# EAGLE board untitled (EAGLE 6.4)
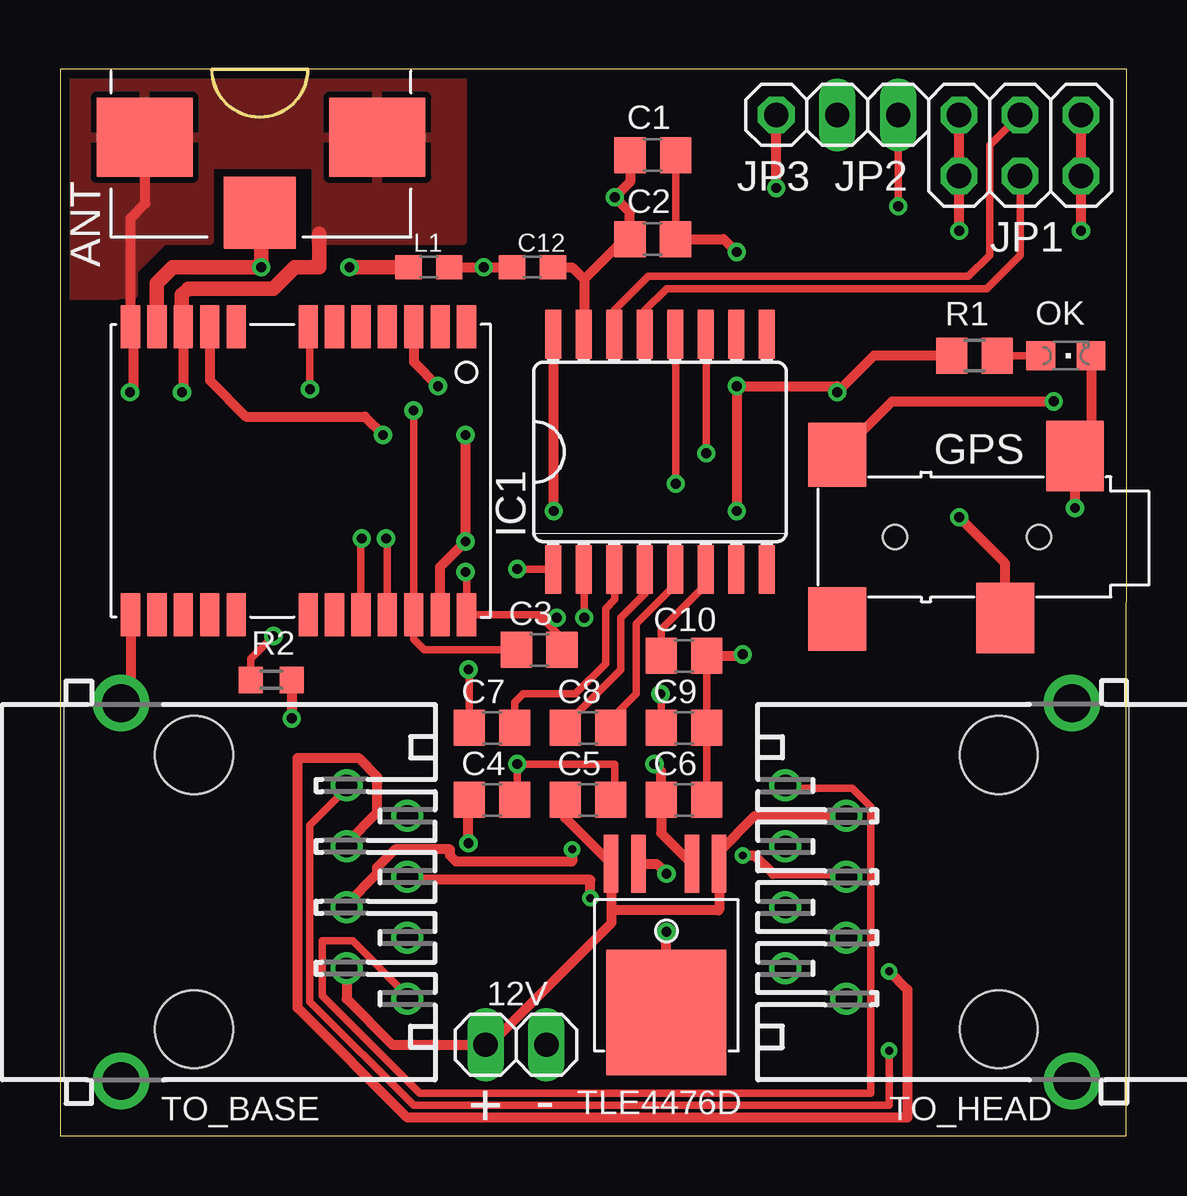
[diagram p0: board, top side]
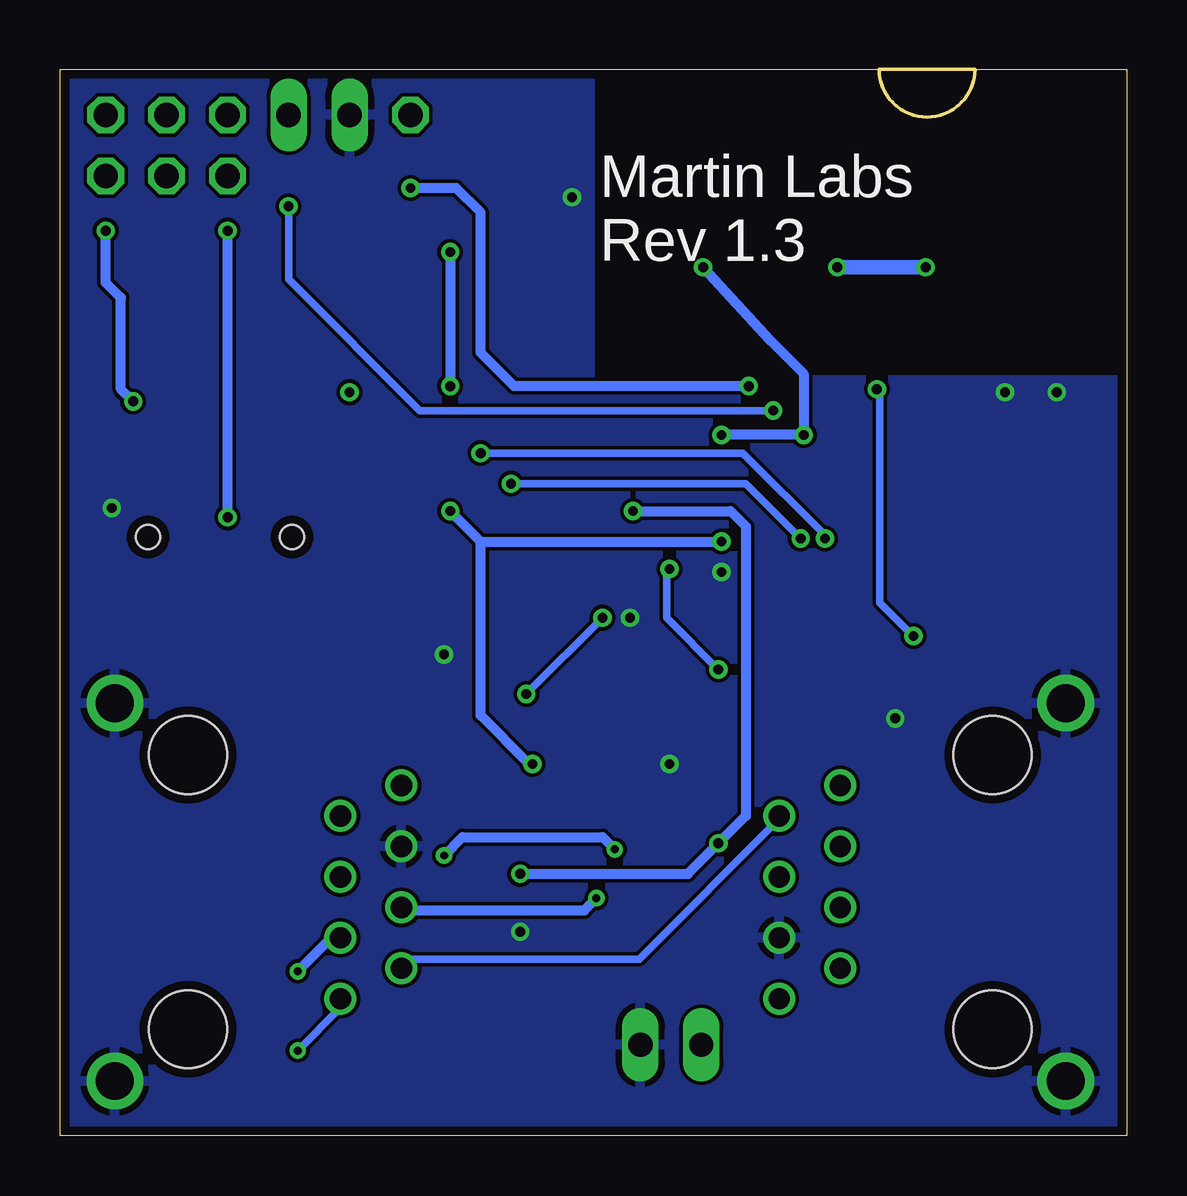
[diagram p1: board, bottom side, seen from below]

Size 44.45 x 44.45 mm. Coordinates in mm from the lower left corner, seen from the top.
Outline: 0,0 44.43,0 44.45,44.45 0,44.45 0,0
Copper layers (1*16): Top 0.0356mm / dielectric 1.5011mm / Bottom 0.0356mm
Design rules "LaenPCBOrder2": minimum track width 6mil, minimum drill 13mil, track to track 6mil, track to pad 6mil, pad to pad 6mil, via to via 6mil, smd to smd 6mil, copper to edge 15mil, drill to drill 6mil, minimum pad ring 7mil, minimum via ring 7mil, stop-mask expansion 4mil, vias tented up to drill 0mil, thermal gap 10mil

## Footprints (pad centres in the part's own frame; a part is rotated, then mirrored left to right if it is on the bottom)
1X02 = drill 1.016 long: 1 -1.27,0; 2 1.27,0
GEO_HELIX_GPSANT = smd 4 x 3.3: GND1 2,-2.84; GND2 11.7,-2.84 | smd 3 x 3: RF_IN 6.8,-5.99
C0805 = smd 1.3 x 1.5: 1 -0.95,0; 2 0.95,0
C0603 = smd 1.1 x 1: 1 -0.85,0; 2 0.85,0
2.5MM_AUDIO = smd 2.4 x 2.95: 1 -9.9,-5.475; 3 -7,1.275 | smd 2.4 x 2.65: 2 0,-5.525; 4 0,1.325 | hole 1: -2.4,-2.1; -8.4,-2.1
SO16L = smd 0.66 x 2.032: 1 -4.445,-4.902; 2 -3.175,-4.902; 3 -1.905,-4.902; 4 -0.635,-4.902; 5 0.635,-4.902; 6 1.905,-4.902; 7 3.175,-4.902; 8 4.445,-4.902; 9 4.445,4.902; 10 3.175,4.902; 11 1.905,4.902; 12 0.635,4.902; 13 -0.635,4.902; 14 -1.905,4.902; 15 -3.175,4.902; 16 -4.445,4.902
2X03 = drill 1.016 octagon: 1 -2.54,-1.27; 2 -2.54,1.27; 3 0,-1.27; 4 0,1.27; 5 2.54,-1.27; 6 2.54,1.27
1X01 = drill 1.016 octagon: 1 0,0
CHIPLED_0805 = smd 1.2 x 1.2: A 0,-1.05; C 0,1.05
R0805 = smd 1.3 x 1.5: 1 -0.95,0; 2 0.95,0
R0603 = smd 1 x 1.1: 1 -0.85,0; 2 0.85,0
TO-252-5 = smd 0.6 x 2.4: EN 4.8,-8.8; Q1 1.44,-8.8; Q2 3.66,-8.8; V_IN 0.3,-8.8 | smd 5 x 5.24: GND 2.5,-2.6
555153-1 = drill 0.889: 1 -4.445,6.35; 2 -3.175,8.89; 3 -1.905,6.35; 4 -0.635,8.89; 5 0.635,6.35; 6 1.905,8.89; 7 3.175,6.35; 8 4.445,8.89 | drill 1.575 pad 2.184: G1 -7.874,-3.048; G2 7.874,-3.048 | hole 3.251: -5.715,0; 5.715,0
24-SMD = smd 1.8 x 0.8: 1 12.9,-14.4; 2 12.9,-13.3; 3 12.9,-12.2; 4 12.9,-11.1; 5 12.9,-10; 6 12.9,-8.9; 7 12.9,-7.8; 8 12.9,-4.8; 9 12.9,-3.7; 10 12.9,-2.6; 11 12.9,-1.5; 12 12.9,-0.4; 13 0.9,-0.4; 14 0.9,-1.5; 15 0.9,-2.6; 16 0.9,-3.7; 17 0.9,-4.8; 18 0.9,-7.8; 19 0.9,-8.9; 20 0.9,-10; 21 0.9,-11.1; 22 0.9,-12.2; 23 0.9,-13.3; 24 0.9,-14.4

## Placement (x,y rotation side)
12V  [1X02]  19,3.8 0 top
ANT  GEO_HELIX_GPSANT  [GEO_HELIX_GPSANT]  1.52,44.45 0 top
C1  .1uF  [C0805]  24.7,40.87 180 top
C2  10uF  [C0805]  24.7,37.37 180 top
C3  2.2uF  [C0805]  19.97,20.25 0 top
C4  22uF  [C0805]  18,14 0 top
C5  .47uF  [C0805]  22,14 0 top
C6  22uF  [C0805]  26,14 0 top
C7  1uF  [C0805]  18,17 0 top
C8  1uF  [C0805]  22,17 0 top
C9  1uF  [C0805]  26,17 0 top
C10  1uF  [C0805]  26,20 0 top
C12  17pF  [C0603]  19.68,36.2 0 top
GPS  2.5MM_JACK  [2.5MM_AUDIO]  32.38,22.86 180 top
IC1  MAX232ECWE  [SO16L]  25,28.5 0 top
JP1  [2X03]  40.01,41.27 0 top
JP2  [1X02]  33.66,42.55 180 top
JP3  [1X01]  29.84,42.55 180 top
L1  47nH  [C0603]  15.37,36.2 0 top
OK  [CHIPLED_0805]  41.91,32.51 270 top
R1  60  [R0805]  38.1,32.51 180 top
R2  100k  [R0603]  8.8,19 180 top
TLE4476D  TLE4476D  [TO-252-5]  27.77,2.54 180 top
TO_BASE  [555153-1]  5.59,10.16 270 top
TO_HEAD  [555153-1]  39.12,10.16 90 top
U$1  TELIT_JN3  [24-SMD]  2.54,20.82 90 top

## Library data of the parts
12V JP1-JP3 = pinhead; OC_NEWARK: unknown
ANT = My_Parts
C1 C3-C6 R1 R2 = rcl; OC_NEWARK: unknown
C2 = rcl; MPN: 06034D106MAT2A; OC_NEWARK: 10R5934
C7-C10 = rcl; MPN: 02016D105MAT2A; OC_NEWARK: 37T9044
C12 L1 = rcl
GPS TLE4476D U$1 = My_Parts; OC_NEWARK: unknown
IC1 = maxim; MF: MAXIM; MPN: MAX232ECWE+; OC_FARNELL: 9724435; OC_NEWARK: 67K4440
OK = led; OC_NEWARK: unknown
TO_BASE TO_HEAD = con-amp; OC_NEWARK: unknown

## Nets
+3V3: C1.1 C2.1 C6.1 C12.1 L1.2 R1.2 TLE4476D.Q1 U$1.9 U$1.23
+5V: C4.1 IC1.16 TLE4476D.Q2
+12V: 12V.1 C5.1 TLE4476D.EN TLE4476D.V_IN TO_BASE.7 TO_HEAD.7
GND: 12V.2 ANT.GND1 ANT.GND2 C1.2 C2.2 C3.2 C4.2 C5.2 C6.2 C9.2 C10.2 C12.2 GPS.1 IC1.15 JP2.2 OK.C R2.1 TLE4476D.GND TO_BASE.6 TO_BASE.G1 TO_BASE.G2 TO_HEAD.6 TO_HEAD.G1 TO_HEAD.G2 U$1.10 U$1.12 U$1.13 U$1.24
N$1: ANT.RF_IN L1.1 U$1.11
N$2: OK.A R1.1
N$3: R2.2 U$1.7
N$4: C3.1 JP2.1 U$1.22
N$5: JP3.1 U$1.3
N$6: C7.1 IC1.1
N$7: C7.2 IC1.3
N$8: C8.1 IC1.4
N$9: C8.2 IC1.5
N$11: TO_BASE.1 TO_HEAD.1
N$12: TO_BASE.2 TO_HEAD.2
N$13: TO_BASE.3 TO_HEAD.3
N$14: TO_BASE.4 TO_HEAD.4
N$15: TO_BASE.5 TO_HEAD.5
N$18: TO_BASE.8 TO_HEAD.8
R1IN: IC1.13 JP1.3
R2IN: IC1.8
R2OUT: IC1.9
RX: GPS.3 JP1.1 JP1.2
RX_IN: IC1.12 U$1.21
T1OUT: IC1.14 JP1.4
T2IN: IC1.10
T2OUT: IC1.7
TX: GPS.2 JP1.5 JP1.6
TX_IN: IC1.11 U$1.20
V_NEG: C10.1 IC1.6
V_PLUS: C9.1 IC1.2

## Tracks (layer width: path | path; a pad name or v marks a point on that pad's centre or on a via)
+3V3  (via drill 0.41, 0.41 pad 0.41)
  Top 0.305: C2.1 25.65,39.6 C1.1
  Top 0.406: TLE4476D.Q1 25.05,12.62 C6.1 25.05,15.21 v24.77,15.49 | U$1.23 15.84,23.71 v16.89,24.77 v16.89,29.21 | R1.2 33.91,32.51 v32.38,30.99 32.38,31.24 v28.19,31.24 v28.19,26.04 | C2.1 27.66,37.37 v28.19,36.83 | U$1.9 6.24,31.48 7.75,29.97 12.7,29.97 v13.46,29.21 | L1.2 v17.65,36.2 C12.1
  Bottom 0.406: v28.19,36.83 v28.19,31.24 | v28.19,26.04 26.92,24.77 | 26.92,24.77 v16.89,24.77 | v16.89,29.21 v13.46,29.21 13.46,31.75 14.86,33.15 v17.65,36.2 | v24.77,15.49 24.89,15.49 26.92,17.53 26.92,24.77
+5V  (via drill 0.41)
  Top 0.406: TLE4476D.Q2 24.86,11.34 v25.27,10.92 | v17.02,12.19 17.02,13.97 C4.1 | IC1.16 20.55,26.05 v20.57,26.04
  Bottom 0.406: v25.27,10.92 18.29,10.92 v17.02,12.19 15.88,13.34 15.88,25.4 16.51,26.04 v20.57,26.04
+12V
  Top 0.406: 22.99,9.4 27.43,9.4 27.46,9.43 TLE4476D.V_IN 27.46,11.84 28.96,13.34 TO_HEAD.7 | 22.99,9.4 22.99,11.32 TLE4476D.EN 21.05,13.26 C5.1 | TO_BASE.7 11.94,5.71 13.84,3.81 12V.1 17.9,3.8 22.99,8.89 22.99,9.4
GND  (via drill 0.41, 0.41 pad 0.41)
  Top 0.305: C6.2 C9.2 C10.2 | C4.2 19.05,14 v19.05,15.49 23.11,15.49 23.11,14 22.86,14 | 42.96,29.01 GPS.1 | v16.89,23.5 16.94,23.45 U$1.24 19.94,21.72 20,21.65 20.92,20.74 C3.2
  Top 0.406: C10.2 28.45,20 v28.45,20.07 | C5.2 22.86,14 | GPS.1 v42.28,26.17 v42.29,26.16 | OK.C 42.96,29.01 | TLE4476D.GND v25.27,8.5 v25.27,8.51 | U$1.10 5.14,31.05 v5.08,30.99 | v2.92,30.99 3.05,31.11 3.05,33.66 2.98,33.72 U$1.12 2.94,38.25 3.56,38.86 3.56,41.54 ANT.GND1 | R2.1 v9.65,17.4 | U$1.13 2.94,18.43 TO_BASE.G1 | C1.2 23.75,39.75 v23.11,39.12 23.75,38.48 C2.2 23.75,37.21 23.37,37.21 21.84,35.69 | v20.7,21.59 20.07,21.59 20,21.65 | C12.2 21.34,36.2 21.84,35.69 | 21.84,35.69 21.84,33.42 IC1.15
  Top 0.61: 5.08,34.04 5.08,35.05 5.33,35.31 8.89,35.31 9.78,36.2 10.79,36.2 10.79,37.59
  pour Bottom: 0.51,31.5 22.35,31.5 22.35,44.45 44.45,44.45 44.45,0 0,0 0,31.5
  pour Top: 3.05,35.05 3.05,36.07 4.32,37.34 6.22,37.34 6.22,40.51 10.67,40.51 10.67,37.34 16.76,37.34 16.76,44.07 0.38,44.07 0.38,35.05
N$1  (via drill 0.41)
  Top 0.61: U$1.11 4.04,35.54 4.7,36.2 v8.38,36.2 8.38,38.39 ANT.RF_IN | L1.1 v12.06,36.2
  Bottom 0.61: v8.38,36.2 v12.06,36.2
N$2
  Top 0.305: OK.A R1.1
N$3  (via drill 0.41)
  Top 0.305: R2.2 7.95,19.89 v8.89,20.83 | v10.41,31.11 10.41,33.65 U$1.7
  Bottom 0.305: v8.89,20.83 10.29,22.23 10.29,30.99 v10.41,31.11
N$4  (via drill 0.41)
  Top 0.305: C3.1 15.18,20.25 14.73,20.7 U$1.22 v14.73,30.23 | JP2.1 v34.92,38.73
  Bottom 0.305: v34.92,38.73 34.92,35.69 29.46,30.23 v14.73,30.23
N$5  (via drill 0.41)
  Top 0.406: U$1.3 14.74,32.25 v15.75,31.24 | v29.84,39.5 JP3.1
  Bottom 0.406: v15.75,31.24 25.53,31.24 26.92,32.64 26.92,38.48 27.94,39.5 v29.84,39.5
N$6  (via drill 0.41)
  Top 0.305: C7.1 17.05,19.4 v17.02,19.43 | v19.05,23.62 20.53,23.62 IC1.1
  Bottom 0.305: v17.02,19.43 19.18,21.59 19.18,23.5 v19.05,23.62
N$7
  Top 0.305: C7.2 18.95,18.06 19.3,18.41 21.46,18.41 22.73,19.68 22.73,21.97 23.11,22.35 23.11,23.58 IC1.3
N$8
  Top 0.305: C8.1 21.05,17.11 23.37,19.43 23.37,21.59 24.38,22.61 24.38,23.58 IC1.4
N$9
  Top 0.305: C8.2 22.95,17.36 24,18.41 24,21.34 25.53,22.86 25.53,23.49 IC1.5
N$11  (via drill 0.33)
  Top 0.305: v34.54,3.56 34.54,1.27 14.73,1.27 10.41,5.59 10.41,12.95 11.94,14.48 TO_BASE.1
  Bottom 0.305: v34.54,3.56 32.77,5.33 TO_HEAD.1
N$12
  Bottom 0.305: TO_BASE.2 14.48,13.21 20.32,7.37 29.97,7.37 30.23,7.11 TO_HEAD.2
N$13  (via drill 0.33)
  Top 0.406: v34.54,6.86 35.31,6.1 35.31,0.76 14.48,0.76 9.91,5.33 9.91,15.75 12.45,15.75 13.21,14.99 13.21,13.46 11.94,12.19 TO_BASE.3
  Bottom 0.406: v34.54,6.86 33.27,8.13 32.77,8.13 TO_HEAD.3
N$14  (via drill 0.33)
  Top 0.406: v22.1,9.91 22.1,10.67 14.48,10.67 TO_BASE.4
  Bottom 0.406: v22.1,9.91 22.61,9.4 30.23,9.4 TO_HEAD.4
N$15  (via drill 0.33)
  Top 0.406: v21.34,11.94 21.34,11.43 16.51,11.43 16.26,11.68 16.26,11.94 13.97,11.94 13.21,11.18 13.21,10.92 11.94,9.65 TO_BASE.5 | v28.45,11.68 28.96,11.68 29.72,10.92 32.77,10.92 TO_HEAD.5
  Bottom 0.406: v21.34,11.94 21.84,12.45 27.69,12.45 v28.45,11.68
N$18
  Top 0.305: TO_BASE.8 14.48,5.84 12.19,8.13 10.92,8.13 10.92,5.84 14.99,1.78 33.78,1.78 33.78,13.72 33.02,14.48 30.23,14.48 TO_HEAD.8
R1IN
  Top 0.305: IC1.13 24.36,34.4 25.27,35.31 38.61,35.31 40.01,36.7 JP1.3
RX  (via drill 0.41)
  Top 0.406: GPS.3 39.38,23.86 v37.47,25.78 | v37.47,37.72 JP1.1 JP1.2
  Bottom 0.406: v37.47,25.78 v37.47,37.72
RX_IN  (via drill 0.41)
  Top 0.305: U$1.21 13.64,24.94 v13.59,24.89 | v25.65,27.18 25.65,33.38 IC1.12
  Bottom 0.305: v13.59,24.89 15.88,27.18 v25.65,27.18
T1OUT
  Top 0.305: IC1.14 23.09,34.4 24.51,35.81 37.85,35.81 38.73,36.7 38.73,41.27 JP1.4
TX  (via drill 0.41)
  Top 0.406: GPS.2 32.45,28.39 34.67,30.61 v41.4,30.61 | v42.55,37.72 JP1.5 JP1.6
  Bottom 0.406: v41.4,30.61 41.91,31.11 41.91,34.92 42.55,35.56 v42.55,37.72
TX_IN  (via drill 0.41)
  Top 0.305: U$1.20 12.54,24.86 v12.57,24.89 | v26.92,28.45 26.92,33.38 IC1.11
  Bottom 0.305: v12.57,24.89 12.57,25.02 16,28.45 v26.92,28.45
V_NEG
  Top 0.305: C10.1 25.05,21.11 26.92,22.99 26.92,23.58 IC1.6
V_PLUS  (via drill 0.41)
  Top 0.305: C9.1 25.05,18.38 v25.02,18.41 | v21.84,21.59 21.84,23.58 IC1.2
  Bottom 0.305: v25.02,18.41 v21.84,21.59

## Text on the board
tPlace: + | -
bPlace: Martin Labs / Rev 1.3